# Altium PCB PCB1.PcbDoc (part 2 of 2)
Units mm, origin at the board's own origin, x right, y up, seen from the top; angles counter-clockwise.
Board outline 100.25 x 87.25 mm, 2 copper layers (Top Layer, Bottom Layer); 105 components, 70 nets, 373 pads, 474 vias.
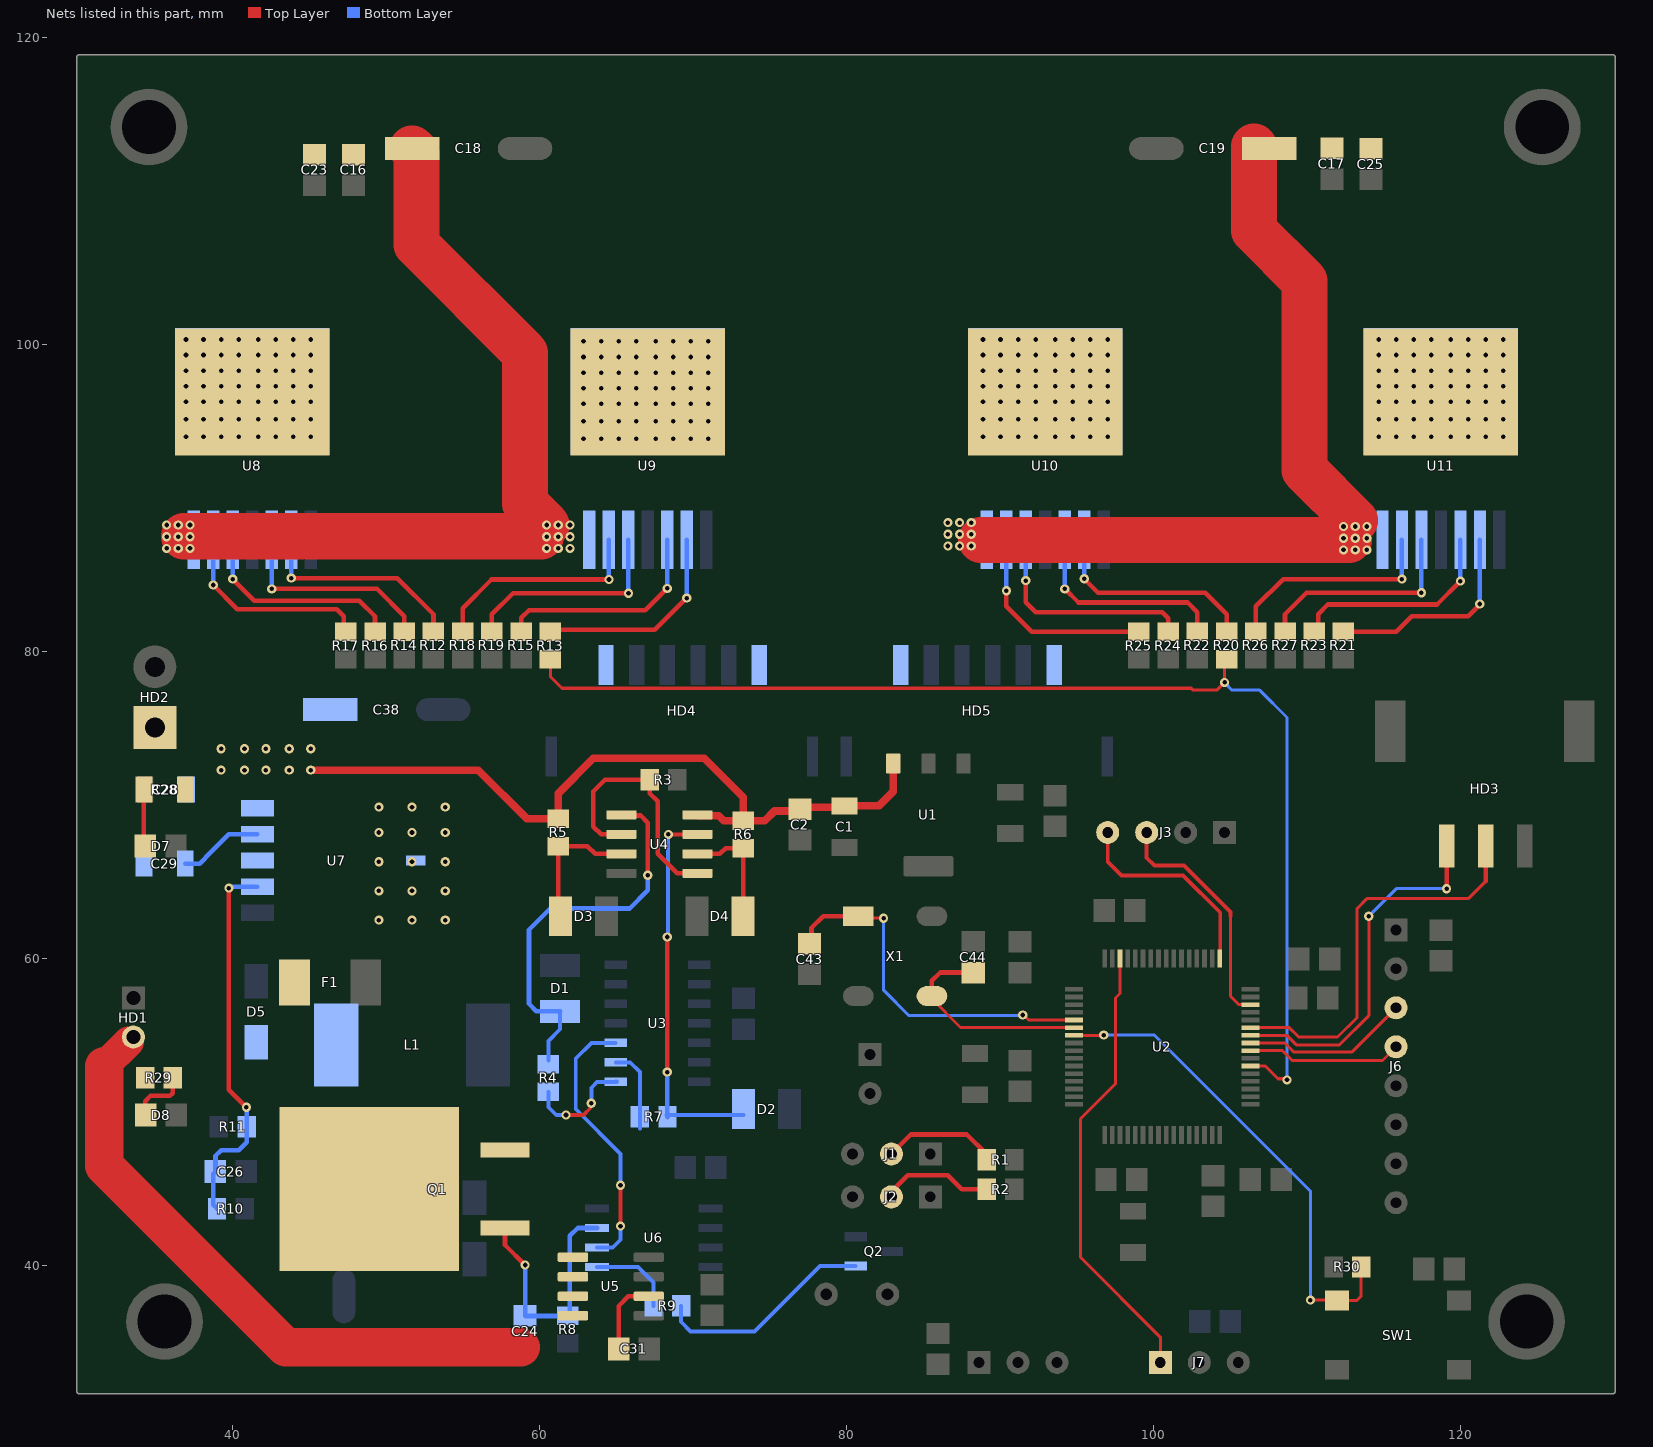
[diagram p2: the nets of this part, all layers, seen from the top]

## Via types
v1: diameter 0.6, hole 0.3, Top Layer to Bottom Layer, 474 vias

## Nets (pads, with @x,y where several pads share a name; then routed paths per layer and width w, separated by ;. In a path a pad name is that pad's centre, name@x,y a point inside that pad or via, vN(x,y) a via of type N, cw(c..) or ccw(c..) an arc to the next point about the centre after c; other vN are vias at no path point) (continued)
NetC26_1: C26.1 R10.2 R11.1 U7.2 | length 24.9
  Top Layer w0.3: v1@39.751,64.516 39.751,51.435 v1(40.894,50.292)
  Bottom Layer w0.3: R10.2@38.978,43.688 38.735,43.931 38.735,45.958 C26.1@38.878,46.101 38.878,47.133 39.243,47.498 40.386,47.498 40.905,48.017 R11.1@40.905,49.022 40.905,50.281 v1(40.894,50.292) ; v1(39.751,64.57) 39.851,64.67 U7.2@41.608,64.67
NetC29_1: C29.1 U7.4 | length 5.5
  Bottom Layer w0.3: C29.1@36.91,66.167 37.846,66.167 38.608,66.929 39.749,68.07 U7.4@41.608,68.07
NetC31_1: C31.1 U5.6 | length 5.1
  Top Layer w0.3: C31.1@65.151,34.544 65.151,37.338 65.786,37.973 U5.6@67.118,37.973 U5.6@67.183,37.973
NetD3_2: D3.2 R5.1 U4.3 | length 9.1
  Top Layer w0.3: D3.2@61.365,62.738 61.214,62.889 R5.1@61.214,67.299 61.33,67.183 61.457,67.31 63.119,67.31 63.627,66.802 U4.3@65.343,66.802
NetD4_2: D4.2 R6.1 U4.6 | length 7.5
  Top Layer w0.3: U4.6@70.293,66.802 71.755,66.802 72.125,67.172 R6.1@73.279,67.172 73.279,65.924 73.268,65.913 D4.2@73.268,62.818
NetD5_1: D5.1 L1.1 U7.3 U7.3.1
  other v1: 49.53,62.484 51.689,62.484 53.848,62.484 49.53,64.389 51.689,64.389 53.848,64.389 49.53,66.294 51.689,66.294 53.848,66.294 49.53,68.199 51.689,68.199 53.848,68.199 49.53,69.85 51.689,69.85 53.848,69.85
NetD7_1: D7.1 R28.1 | length 3.7
  Top Layer w0.3: R28.1@34.21,70.993 34.21,67.406 D7.1@34.306,67.31
NetD8_1: D8.1 R29.1 | length 3.9
  Top Layer w0.3: D8.1@34.322,49.784 34.29,49.816 34.29,50.673 34.644,51.027 35.914,51.027 36.09,51.203 R29.1@36.09,52.197
NetF1_2: F1.2 Q1.2
NetHD4_1: HD4.1 pad.2@41.275,96.901 U8.8
  other v1: 36.957,93.98 38.1,93.98 39.243,93.98 40.386,93.98 41.656,93.98 42.799,93.98 43.942,93.98 45.085,93.98 36.957,95.123 38.1,95.123 39.243,95.123 40.386,95.123 41.656,95.123 42.799,95.123 43.942,95.123 45.085,95.123 36.957,96.266 38.1,96.266 39.243,96.266 40.386,96.266 41.656,96.266 42.799,96.266 43.942,96.266 45.085,96.266 36.957,97.282 38.1,97.282 39.243,97.282 40.386,97.282 41.656,97.282 42.799,97.282 43.942,97.282 45.085,97.282 36.957,98.298 38.1,98.298 39.243,98.298 40.386,98.298 41.656,98.298 42.799,98.298 43.942,98.298 45.085,98.298 36.957,99.314 38.1,99.314 39.243,99.314 40.386,99.314 41.656,99.314 42.799,99.314 43.942,99.314 45.085,99.314 36.957,100.33 38.1,100.33 39.243,100.33 40.386,100.33 41.656,100.33 42.799,100.33 43.942,100.33 45.085,100.33
NetHD4_6: HD4.6 pad.2@67.056,96.901 U9.8
  other v1: 62.865,93.853 64.008,93.853 65.151,93.853 66.294,93.853 67.564,93.853 68.707,93.853 69.85,93.853 70.993,93.853 62.865,94.996 64.008,94.996 65.151,94.996 66.294,94.996 67.564,94.996 68.707,94.996 69.85,94.996 70.993,94.996 62.865,96.139 64.008,96.139 65.151,96.139 66.294,96.139 67.564,96.139 68.707,96.139 69.85,96.139 70.993,96.139 62.865,97.155 64.008,97.155 65.151,97.155 66.294,97.155 67.564,97.155 68.707,97.155 69.85,97.155 70.993,97.155 62.865,98.171 64.008,98.171 65.151,98.171 66.294,98.171 67.564,98.171 68.707,98.171 69.85,98.171 70.993,98.171 62.865,99.187 64.008,99.187 65.151,99.187 66.294,99.187 67.564,99.187 68.707,99.187 69.85,99.187 70.993,99.187 62.865,100.203 64.008,100.203 65.151,100.203 66.294,100.203 67.564,100.203 68.707,100.203 69.85,100.203 70.993,100.203
NetHD5_1: HD5.1 pad.2@92.964,96.901 U10.8
  other v1: 88.9,93.98 90.043,93.98 91.186,93.98 92.329,93.98 93.599,93.98 94.742,93.98 95.885,93.98 97.028,93.98 88.9,95.123 90.043,95.123 91.186,95.123 92.329,95.123 93.599,95.123 94.742,95.123 95.885,95.123 97.028,95.123 88.9,96.266 90.043,96.266 91.186,96.266 92.329,96.266 93.599,96.266 94.742,96.266 95.885,96.266 97.028,96.266 88.9,97.282 90.043,97.282 91.186,97.282 92.329,97.282 93.599,97.282 94.742,97.282 95.885,97.282 97.028,97.282 88.9,98.298 90.043,98.298 91.186,98.298 92.329,98.298 93.599,98.298 94.742,98.298 95.885,98.298 97.028,98.298 88.9,99.314 90.043,99.314 91.186,99.314 92.329,99.314 93.599,99.314 94.742,99.314 95.885,99.314 97.028,99.314 88.9,100.33 90.043,100.33 91.186,100.33 92.329,100.33 93.599,100.33 94.742,100.33 95.885,100.33 97.028,100.33
NetHD5_6: HD5.6 pad.2@118.745,96.901 U11.8
  other v1: 114.681,93.98 115.824,93.98 116.967,93.98 118.11,93.98 119.38,93.98 120.523,93.98 121.666,93.98 122.809,93.98 114.681,95.123 115.824,95.123 116.967,95.123 118.11,95.123 119.38,95.123 120.523,95.123 121.666,95.123 122.809,95.123 114.681,96.266 115.824,96.266 116.967,96.266 118.11,96.266 119.38,96.266 120.523,96.266 121.666,96.266 122.809,96.266 114.681,97.282 115.824,97.282 116.967,97.282 118.11,97.282 119.38,97.282 120.523,97.282 121.666,97.282 122.809,97.282 114.681,98.298 115.824,98.298 116.967,98.298 118.11,98.298 119.38,98.298 120.523,98.298 121.666,98.298 122.809,98.298 114.681,99.314 115.824,99.314 116.967,99.314 118.11,99.314 119.38,99.314 120.523,99.314 121.666,99.314 122.809,99.314 114.681,100.33 115.824,100.33 116.967,100.33 118.11,100.33 119.38,100.33 120.523,100.33 121.666,100.33 122.809,100.33
NetJ1_2: J1.2 R1.1 | length 7.4
  Top Layer w0.3: J1.2@82.931,47.244 84.201,48.514 87.846,48.514 89.143,47.217 R1.1@89.143,47.117
NetJ2_2: J2.2 R2.1 | length 7.3
  Top Layer w0.3: J2.2@82.931,44.45 82.931,44.775 84.003,45.847 86.614,45.847 87.503,44.958 R2.1@89.143,44.958
NetQ1_3: Q1.3 U5.1 U5.2
NetQ2_3: Q2.3 R9.1 | length 14.4
  Bottom Layer w0.254: R9.1@69.226,37.338 69.226,36.311 69.85,35.687 74.012,35.687 78.269,39.944 Q2.3@80.584,39.944
NetR4_1: R4.1 U3.1 | length 7.2
  Top Layer w0.254: v1(61.722,49.784) 62.865,49.784 63.307,50.226 63.307,50.48 v1(63.373,50.546)
  Bottom Layer w0.254: R4.1@60.579,51.297 60.579,50.292 61.087,49.784 v1(61.722,49.784) ; v1(63.373,50.546) 63.373,51.562 63.754,51.943 U3.1@64.897,51.943
  Bottom Layer w0.3: U3.1@64.967,51.943 U3.1@65.024,51.943
NetR7_1: R7.1 U3.2 | length 5.5
  Bottom Layer w0.254: U3.2@64.967,53.213 65.913,53.213 66.537,52.589 66.537,48.895
NetR9_2: R9.2 U6.5 | length 5.6
  Bottom Layer w0.254: U6.5@63.741,39.878 66.421,39.878 67.437,38.862 R9.2@67.437,37.338
NetR12_2: R12.2 U8.2 | length 13.9
  Top Layer w0.3: v1(43.815,84.778) 50.731,84.778 53.086,82.423 R12.2@53.086,81.291
  Bottom Layer w0.3: v1(43.815,84.778) U8.2@43.815,87.268
NetR13_1: R13.1 U9.2 | length 13.6
  Top Layer w0.3: R13.1@60.706,81.28 60.833,81.407 67.495,81.407 69.559,83.471 v1(69.587,83.471)
  Bottom Layer w0.3: v1(69.587,83.471) 69.591,83.475 69.591,87.263 U9.2@69.596,87.268
NetR14_2: R14.2 U8.3 | length 13.6
  Top Layer w0.3: v1(42.545,84.074) 49.403,84.074 51.181,82.296 R14.2@51.181,81.291
  Bottom Layer w0.3: v1(42.545,84.074) U8.3@42.545,87.268
NetR15_1: R15.1 U9.3 | length 14.4
  Top Layer w0.3: R15.1@58.801,81.291 58.817,81.307 58.817,82.185 59.309,82.677 66.888,82.677 v1(68.317,84.106)
  Bottom Layer w0.3: v1(68.317,84.106) 68.321,84.11 68.321,87.263 U9.3@68.326,87.268
NetR16_1: R16.1 U8.5 | length 13.8
  Top Layer w0.3: v1(40.005,84.709) 41.402,83.312 48.26,83.312 49.276,82.296 R16.1@49.276,81.28
  Bottom Layer w0.3: v1(40.005,84.709) U8.5@40.005,87.268
NetR17_1: R17.1 U8.6 | length 13.4
  Top Layer w0.3: v1(38.735,84.328) 40.305,82.758 46.782,82.758 47.244,82.296 47.244,81.407 R17.1@47.371,81.28
  Bottom Layer w0.3: v1(38.735,84.328) U8.6@38.735,87.268
NetR18_1: R18.1 U9.6 | length 14.4
  Top Layer w0.3: R18.1@54.991,81.291 54.991,82.804 56.869,84.682 v1(64.524,84.682)
  Bottom Layer w0.3: U9.6@64.516,87.268 64.52,87.264 64.52,84.686 v1(64.524,84.682)
NetR19_1: R19.1 U9.5 | length 14.1
  Top Layer w0.3: R19.1@56.896,81.291 56.896,82.423 58.266,83.793 v1(65.794,83.793)
  Bottom Layer w0.3: U9.5@65.786,87.268 65.79,87.264 65.79,83.797 v1(65.794,83.793)
NetR20_2: R20.2 U10.2 | length 13.9
  Top Layer w0.3: v1(95.495,84.741) 95.495,84.718 96.393,83.82 103.378,83.82 104.775,82.423 R20.2@104.775,81.291
  Bottom Layer w0.3: v1(95.495,84.741) 95.499,84.745 95.499,87.263 U10.2@95.504,87.268
NetR21_1: R21.1 U11.2 | length 13.8
  Top Layer w0.3: R21.1@112.395,81.291 115.835,81.291 116.84,82.296 120.523,82.296 121.276,83.049 v1(121.276,83.09)
  Bottom Layer w0.3: v1(121.276,83.09) 121.28,83.094 121.28,87.263 U11.2@121.285,87.268
NetR22_2: R22.2 U10.3 | length 13.7
  Top Layer w0.3: v1(94.234,84.074) 95.123,83.185 102.235,83.185 102.87,82.55 R22.2@102.87,81.291
  Bottom Layer w0.3: v1(94.234,84.074) U10.3@94.234,87.268
NetR23_1: R23.1 U11.3 | length 14.1
  Top Layer w0.3: R23.1@110.49,81.291 110.74,81.541 110.74,82.419 111.379,83.058 118.491,83.058 v1(120.015,84.582)
  Bottom Layer w0.3: v1(120.015,84.582) U11.3@120.015,87.268
NetR24_1: R24.1 U10.5 | length 14.7
  Top Layer w0.3: v1(91.685,84.614) 91.685,83.194 92.329,82.55 100.584,82.55 100.965,82.169 R24.1@100.965,81.28
  Bottom Layer w0.3: v1(91.685,84.614) 91.689,84.618 91.689,87.263 U10.5@91.694,87.268
NetR25_1: R25.1 U10.6 | length 13.7
  Top Layer w0.3: v1(90.424,83.947) 90.424,82.931 92.075,81.28 R25.1@99.06,81.28
  Bottom Layer w0.3: v1(90.424,83.947) U10.6@90.424,87.268
NetR26_1: R26.1 U11.6 | length 14.5
  Top Layer w0.3: R26.1@106.68,81.291 106.68,82.931 108.458,84.709 v1(116.205,84.709)
  Bottom Layer w0.3: v1(116.205,84.709) U11.6@116.205,87.268
NetR27_1: R27.1 U11.5 | length 14
  Top Layer w0.3: R27.1@108.585,81.291 108.585,82.423 109.982,83.82 v1(117.475,83.82)
  Bottom Layer w0.3: v1(117.475,83.82) U11.5@117.475,87.268
OSC_IN: C43.2 U2.5 X1.1 | length 23.1
  Top Layer w0.2: X1.1@80.772,62.738 80.899,62.611 v1(82.423,62.611) ; v1(91.486,56.303) 91.552,56.303 91.876,55.979 U2.5@94.834,55.979
  Top Layer w0.3: C43.2@77.597,60.944 77.724,61.071 77.724,61.976 78.486,62.738 X1.1@79.782,62.738
  Bottom Layer w0.2: v1(82.423,62.611) 82.423,57.912 84.074,56.261 91.444,56.261 v1(91.486,56.303)
OSC_OUT: C44.1 U2.6 X1.3 | length 14.1
  Top Layer w0.2: X1.3@85.572,57.538 85.572,57.352 87.439,55.485 93.839,55.485 93.846,55.479 U2.6@94.834,55.479
  Top Layer w0.3: X1.3@85.572,57.538 85.572,58.521 86.122,59.071 C44.1@88.265,59.071
REVERSE: R13.2 R20.1 U2.38 | length 78.5
  Top Layer w0.2: R13.2@60.706,79.48 60.706,78.359 61.468,77.597 102.472,77.597 102.599,77.47 104.14,77.47 104.622,77.952 104.648,77.952 104.648,79.364 R20.1@104.775,79.491 ; U2.38@106.334,52.979 107.295,52.979 108.127,52.147 108.635,52.147 v1(108.712,52.07)
  Bottom Layer w0.2: v1(104.648,77.978) 104.648,77.952 105.13,77.47 106.934,77.47 108.712,75.692 v1@108.712,52.227
RST: R30.1 SW1.3 U2.7 | length 32.1
  Top Layer w0.2: U2.7@94.834,54.979 96.762,54.979 v1(96.774,54.991) ; v1(110.236,37.719) 111.94,37.719 SW1.3@111.976,37.683 113.248,37.683 113.549,37.984 R30.1@113.549,39.878
  Bottom Layer w0.2: v1(96.774,54.991) 100.076,54.991 110.236,44.831 v1(110.236,37.719)
RX: HD3.2 U2.43 | length 26.2
  Top Layer w0.2: U2.43@106.334,55.479 108.859,55.479 109.474,54.864 112.007,54.864 113.284,56.141 113.284,63.246 113.919,63.881 120.523,63.881 121.666,65.024
  Top Layer w0.3: 121.666,65.024 HD3.2@121.666,67.31
SCL: J6.3 U2.41 | length 10.9
  Top Layer w0.2: U2.41@106.334,54.479 108.558,54.479 109.135,53.902 112.957,53.902 J6.3@115.824,56.769
SCLK: J3.4 U2.49 | length 13.6
  Top Layer w0.2: U2.49@104.334,59.979 104.334,60.446 104.364,60.476 104.364,60.78
  Top Layer w0.254: J3.4@97.028,68.199 97.028,66.294 97.917,65.405 101.928,65.405 104.364,62.969 104.364,60.78
SDA: J6.4 U2.40 | length 10.1
  Top Layer w0.2: U2.40@106.334,53.979 108.416,53.979 109.055,53.34 114.935,53.34 J6.4@115.824,54.229
SDIO: J3.3 U2.46 | length 15.6
  Top Layer w0.2: 105.029,62.738 105.029,57.531 105.581,56.979 U2.46@106.334,56.979
  Top Layer w0.254: J3.3@99.568,68.199 99.568,66.548 100.076,66.04 102.011,66.04 105.029,63.022 105.029,62.738
SIGNAL: C24.1 Q1.1 R8.2 U6.7 | length 16.4
  Top Layer w0.3: Q1.1@57.747,42.418 57.747,41.313 v1(59.055,40.005)
  Bottom Layer w0.3: C24.1@59.055,36.687 61.96,36.687 R8.2@61.976,36.703 ; C24.1@59.055,36.703 v1(59.055,40.005) ; R8.2@61.849,36.703 61.976,36.83 61.976,41.91 62.484,42.418 U6.7@63.741,42.418
Steer: J7.1 U2.62 | length 29.6
  Top Layer w0.2: U2.62@97.834,59.979 97.834,57.702 97.536,57.404 97.536,51.816 95.25,49.53 95.25,40.513 100.457,35.306 J7.1@100.457,33.655
ToVcc_NANO: HD1.2 R29.2 U5.3 U5.4 | length 40.8
  Top Layer w2: 31.623,52.959 HD1.2@33.21,54.546
  Top Layer w2.5: 31.623,52.959 31.623,46.482 43.456,34.649 58.779,34.649
TX: HD3.1 U2.42 | length 23.8
  Top Layer w0.2: U2.42@106.334,54.979 108.7,54.979 109.323,54.356 112.141,54.356 114.046,56.261 v1(114.046,62.738)
  Top Layer w0.3: v1(119.113,64.535) 119.113,67.297 HD3.1@119.126,67.31
  Bottom Layer w0.2: v1(114.046,62.738) 115.843,64.535 v1(119.113,64.535)
V_CELL: C1.1 C2.1 C16.1 C17.1 C18.1 C19.1 C23.1 C25.1 C28.2 C29.2 C38.1 HD2.1 R5.2 R6.2 R28.2 U1.3 U4.8 U7.5 U8.7 U9.7 U10.7 U11.7 | length 152
  Top Layer w0.5: HD2.1@34.925,74.549 HD2.1@35.052,74.676 ; v1(45.085,72.263) 56.007,72.263 59.182,69.088 R5.2@61.214,69.088 ; R5.2@61.214,69.099 61.214,70.739 63.5,73.025 70.739,73.025 73.279,70.485 R6.2@73.279,69.188 ; U4.8@70.293,69.342 70.343,69.292 71.678,69.292 71.998,68.972 R6.2@73.279,68.972 74.687,68.972 75.311,69.596 C2.1@77.089,69.596 ; C2.1@76.962,69.707 77.105,69.85 79.803,69.85 C1.1@79.883,69.93 82.122,69.93 83.058,70.866 U1.3@83.058,72.644
  Top Layer w3: 36.83,87.503 49.93,87.503 ; 50.292,87.503 60.09,87.503 ; C18.1@51.689,112.776 51.967,112.498 51.967,106.529 59.055,99.441 59.055,89.643 v1(60.46,88.238) ; 88.773,87.249 112.764,87.249 ; C19.1@106.553,112.903 106.553,107.442 109.855,104.14 109.855,92.214 ; 109.855,91.821 113.157,88.519
  other v1: 39.243,72.263 40.767,72.263 42.164,72.263 43.688,72.263 39.243,73.66 40.767,73.66 42.164,73.66 43.688,73.66 45.085,73.66 112.395,86.614 113.157,86.614 113.919,86.614 35.695,86.714 36.457,86.714 37.219,86.714 60.46,86.714 61.222,86.714 61.984,86.714 86.614,86.868 87.376,86.868 88.138,86.868 112.395,87.376 113.157,87.376 113.919,87.376 35.695,87.476 36.457,87.476 37.219,87.476 60.46,87.476 61.222,87.476 61.984,87.476 86.614,87.63 87.376,87.63 88.138,87.63 112.395,88.138 113.157,88.138 113.919,88.138 35.695,88.238 36.457,88.238 37.219,88.238 61.222,88.238 61.984,88.238 86.614,88.392 87.376,88.392 88.138,88.392
Volt_SIG: U3.3 U6.6 | length 17.8
  Top Layer w0.254: v1(65.278,42.545) v1(65.278,45.212)
  Bottom Layer w0.254: U6.6@63.741,41.148 64.77,41.148 65.278,41.656 v1(65.278,42.545) ; U3.3@64.967,54.483 63.373,54.483 62.357,53.467 62.357,50.165 65.278,47.244 v1(65.278,45.212)
Vout_1: D1.2 R4.2 U4.1 | length 25.7
  Top Layer w0.3: U4.1@65.343,69.342 65.379,69.306 66.584,69.306 67.056,68.834 v1(67.056,65.405)
  Bottom Layer w0.254: R4.2@60.579,53.34 60.579,54.61 61.341,55.372 D1.2@61.341,56.539
  Bottom Layer w0.3: D1.2@61.341,56.539 59.793,56.539 59.309,57.023 59.309,61.849 60.706,63.246 65.873,63.246 67.056,64.429 v1(67.056,65.405)
Vout_2: D2.2 R7.2 U4.7 | length 25.4
  Top Layer w0.254: v1(68.395,68.072) U4.7@70.293,68.072
  Top Layer w0.3: v1(68.326,52.578) v1(68.326,61.383)
  Bottom Layer w0.254: R7.2@68.262,49.784 68.326,49.784 D2.2@73.303,49.784 ; v1(68.326,61.383) 68.361,61.417 68.361,68.038 v1(68.395,68.072)
  Bottom Layer w0.3: v1(68.326,52.578) 68.326,49.784 68.326,49.668 R7.2@68.337,49.657
Vref: R3.1 U4.2 U4.5 | length 16.5
  Top Layer w0.3: U4.2@65.343,68.072 64.008,68.072 63.5,68.58 63.5,70.866 64.262,71.628 R3.1@67.172,71.628 67.183,71.617 67.183,70.739 67.691,70.231 67.691,66.802 68.961,65.532 U4.5@70.293,65.532
pads on no net: HD3. HD4. HD4.2 HD4.3 HD4.4 HD4.5 HD5. J6.5 J6.6 J6.7 J6.8 U1.2 U2.2 U2.3 U2.4 U2.8 U2.9 U2.10 U2.11 U2.14 U2.15 U2.16 U2.17 U2.20 U2.21 U2.22 U2.23 U2.24 U2.25 U2.26 U2.27 U2.29 U2.30 U2.33 U2.34 U2.35 U2.36 U2.44 U2.45 U2.50 U2.51 U2.52 U2.53 U2.54 U2.55 U2.56 U2.59 U3.4 U3.5 U3.6 U3.8 U3.9 U3.10 U3.11 U3.12 U3.13 U6.2 U6.3 U8.4 U9.4 U10.4 U11.4

## Polygon pours and split planes (outlines as drawn)
GND on Top Layer "GND_L01_P089" (solid, pour order 89): 30.353,80.01 30.353,56.515 38.354,56.515 38.354,65.405 33.02,65.405 33.02,77.597 34.925,77.597 34.925,80.01
GND on Top Layer "GND_L01_P104" (solid, pour order 104): 92.329,37.338 94.742,37.338 94.742,40.894 92.329,40.894
V_CELL on Top Layer "NONET_L02_P-001" (solid, pour order 108): 35.56,76.454 35.56,69.469 46.609,69.469 46.609,76.454
GND on Top Layer "NONET_L02_P-001" (solid, pour order 107): 36.83,68.072 36.83,65.278 38.354,65.278 38.354,68.072
+5 on Top Layer "+5_L01_P105" (solid, pour order 105): 89.916,34.861 83.312,34.862 83.312,36.767 89.916,36.766
GND on Top Layer "GND_L01_P074" (solid, pour order 74): 57.023,113.538 101.981,113.538 101.981,108.204 57.023,108.204
GND on Top Layer "GND_L01_P101" (solid, pour order 101): 75.184,85.471 76.805,87.122 76.805,88.773 74.676,88.773 74.549,88.646 74.549,85.471
GND on Top Layer "GND_L01_P100" (solid, pour order 100): 71.12,89.535 75.184,89.535 75.184,85.471 71.12,85.471
GND on Top Layer "GND_L01_P099" (solid, pour order 99): 44.577,108.204 46.99,105.791 46.99,89.662 49.53,89.662 49.53,107.315 48.641,108.204
ToVcc_NANO on Top Layer "TOVCC_NANO_L01_P024" (solid, pour order 24): 60.579,38.354 63.246,38.354 63.246,33.401 57.023,33.401 57.023,35.746 58.674,36.957
GND on Top Layer "GND_L01_P078" (solid, pour order 78): 44.577,110.744 48.641,110.744 48.641,107.95 44.577,107.95
GND on Top Layer "GND_L01_P075" (solid, pour order 75): 110.871,111.125 114.935,111.125 114.935,108.331 110.871,108.331
V_CELL on Top Layer "V_CELL_L01_P061" (solid, pour order 61): 53.086,118.364 116.078,118.364 116.078,114.554 53.213,114.554 53.086,114.681
GND on Top Layer "GND_L01_P073" (solid, pour order 73): 100.584,95.631 100.584,91.44 103.505,91.44 103.505,95.631
V_CELL on Top Layer "V_CELL_L01_P068" (solid, pour order 68): 89.154,89.154 86.106,89.154 86.106,85.344 89.154,85.344
V_CELL on Top Layer "V_CELL_L01_P067" (solid, pour order 67): 104.648,114.935 104.648,111.887 114.935,111.887 116.078,113.03 116.078,115.189
V_CELL on Top Layer "V_CELL_L01_P066" (solid, pour order 66): 114.808,89.09 111.76,89.09 111.76,85.407 114.808,85.407
V_CELL on Top Layer "V_CELL_L01_P064" (solid, pour order 64): 37.719,89.154 35.306,89.154 35.306,85.471 37.719,85.471
V_CELL on Top Layer "V_CELL_L01_P063" (solid, pour order 63): 62.865,89.154 59.817,89.154 59.817,85.344 62.865,85.344
V_CELL on Top Layer "V_CELL_L01_P060" (solid, pour order 60): 30.226,104.521 30.226,110.744 42.164,110.744 35.941,104.521
V_CELL on Top Layer "V_CELL_L01_P059" (solid, pour order 59): 30.226,104.902 30.226,83.312 34.798,83.312 34.798,105.006
V_CELL on Top Layer "V_CELL_L01_P058" (solid, pour order 58): 44.958,111.887 53.467,111.887 53.467,118.364 38.481,118.364 38.481,112.903 33.655,108.077 34.544,101.727
V_CELL on Top Layer "V_CELL_L01_P057" (solid, pour order 57): 35.56,81.407 38.862,78.105 41.529,78.105 41.529,81.407 41.402,81.534
V_CELL on Top Layer "V_CELL_L01_P056" (solid, pour order 56): 30.226,84.709 37.338,84.709 40.64,81.407 40.64,81.026 30.226,81.026
V_CELL on Top Layer "V_CELL_L01_P055" (solid, pour order 55): 38.227,76.2 46.609,76.2 46.609,76.708 41.275,82.042 38.227,82.042
NetQ1_3 on Top Layer "NETQ1_3_L01_P023" (solid, pour order 23): 59.055,48.006 59.563,48.006 63.246,48.006 63.246,38.862 60.579,38.862 60.579,43.434 60.389,43.878 58.61,45.402 56.261,45.402 56.261,47.003 56.261,48.006
+5 on Top Layer "+5_L01_P050" (solid, pour order 50): 57.785,57.023 58.166,57.023 61.341,53.848 57.023,53.848
+5 on Top Layer "+5_L01_P000" (solid, pour order 0): 55.118,57.023 58.166,57.023 58.166,51.562 55.118,51.562
NetF1_2 on Top Layer "NETF1_2_L01_P032" (solid, pour order 32): 45.085,56.388 53.467,49.784 45.72,49.784 45.085,49.784
ToVcc_NANO on Top Layer "TOVCC_NANO_L01_P026" (solid, pour order 26): 30.353,51.435 30.353,55.753 34.925,55.753 34.925,51.435
+5 on Top Layer "+5_L01_P015" (solid, pour order 15): 49.276,59.864 51.181,58.928 55.118,56.261 58.166,56.388 57.277,59.864 50.024,59.864
NetF1_2 on Top Layer "NETF1_2_L01_P018" (solid, pour order 18): 42.989,57.023 42.989,50.165 45.529,50.292 45.529,59.944 42.989,59.944
+5 on Top Layer "+5_L01_P016" (solid, pour order 16): 49.276,59.864 49.276,57.023 51.562,57.023 51.562,59.69 51.388,59.864
+5 on Top Layer "+5_L01_P014" (solid, pour order 14): 49.911,59.944 55.118,56.261 55.753,52.578 51.562,56.769
GND on Bottom Layer "GND_L02_P086" (solid, pour order 86): 30.353,78.486 30.353,56.515 38.735,56.515 38.735,64.262 33.02,64.262 33.02,78.486
GND on Bottom Layer "NONET_L02_P-001" (solid, pour order 123): 71.882,39.624 74.676,39.624 74.676,40.64 71.882,40.64
GND on Bottom Layer "NONET_L02_P-001" (solid, pour order 112): 37.211,81.28 54.61,81.28 54.61,77.597 37.211,77.597
NetHD5_1 on Bottom Layer "NETHD5_1_L02_P053" (solid, pour order 53): 88.519,101.092 80.137,95.6 80.137,81.581 84.074,77.752 84.074,92.964 89.281,92.964
NetHD4_1 on Bottom Layer "NONET_L02_P-001" (solid, pour order 122): 64.77,80.391 62.992,82.169 58.547,82.169
NetHD4_1 on Bottom Layer "NONET_L02_P-001" (solid, pour order 121): 56.261,85.471 60.325,81.407 56.261,81.407
NetHD5_6 on Bottom Layer "NONET_L02_P-001" (solid, pour order 120): 105.664,97.155 109.601,101.092 114.427,101.092 105.664,92.329
NetHD5_6 on Bottom Layer "NONET_L02_P-001" (solid, pour order 119): 113.792,101.092 105.664,92.964 105.664,83.439 95.885,83.439 92.964,80.518 92.964,77.724 95.631,77.724 98.044,80.137 110.49,80.137 110.49,92.837 113.665,92.837 113.792,92.964
NetHD5_1 on Bottom Layer "NONET_L02_P-001" (solid, pour order 116): 88.011,101.092 84.455,101.092 80.137,96.774 80.137,95.377 84.836,95.377 88.011,98.552
NetHD4_6 on Bottom Layer "NETHD4_6_L02_P115" (solid, pour order 115): 71.501,101.092 74.422,101.092 78.486,97.028 78.486,93.975
NetHD4_6 on Bottom Layer "NETHD4_6_L02_P042" (solid, pour order 42): 71.633,101.107 78.486,95.309 78.486,81.636 74.168,78.181 74.168,92.837 69.034,92.837
NetHD4_1 on Bottom Layer "NONET_L02_P-001" (solid, pour order 114): 59.69,78.486 60.452,77.724 64.77,77.724 64.77,78.486
GND on Bottom Layer "NONET_L02_P-001" (solid, pour order 113): 49.276,77.597 49.276,73.406 54.61,73.406 54.61,78.247
V_CELL on Bottom Layer "V_CELL_L02_P033" (solid, pour order 33): 35.56,76.454 39.497,76.454 47.879,76.454 47.879,72.978 44.704,70.806 44.704,69.215 38.776,69.215 35.651,69.215 35.645,69.681
NetHD5_1 on Bottom Layer "NONET_L02_P-001" (solid, pour order 111): 80.137,82.042 80.137,80.391 82.677,77.851 83.312,77.851 83.312,78.867
NetHD4_1 on Bottom Layer "NETHD4_1_L02_P048" (solid, pour order 48): 46.101,101.092 53.975,101.092 56.642,98.425 56.642,83.312 51.562,83.312 51.562,92.837 46.101,92.837
V_CELL on Bottom Layer "NONET_L02_P-001" (solid, pour order 110): 38.227,76.454 38.227,76.962 46.355,76.962 46.863,76.454
V_CELL on Bottom Layer "NONET_L02_P-001" (solid, pour order 109): 33.655,65.913 33.655,69.342 39.37,69.342 37.592,67.564 34.798,67.564 34.798,65.913
+5 on Bottom Layer "+5_L02_P037" (solid, pour order 37): 40.576,42.926 40.576,46.889 44.386,48.006 58.229,48.006 58.229,42.926
GND on Bottom Layer "GND_L02_P093" (solid, pour order 93): 62.611,35.433 56.007,35.433 56.007,32.258 62.611,32.258
+5 on Bottom Layer "+5_L02_P049" (solid, pour order 49): 55.118,57.277 58.293,57.277 58.293,47.625 55.118,47.625
+5 on Bottom Layer "+5_L02_P036" (solid, pour order 36): 54.356,47.117 58.293,47.117 58.293,57.785 54.356,57.785
GND on Bottom Layer "GND_L02_P092" (solid, pour order 92): 30.353,56.896 30.353,32.258 56.769,32.258 56.769,41.529 37.338,41.529 37.338,56.896
GND on Bottom Layer "GND_L02_P102" (solid, pour order 102): 92.202,38.481 94.488,38.481 94.488,40.894 92.202,40.894
GND on Bottom Layer "GND_L02_P097" (solid, pour order 97): 39.624,57.15 39.624,48.387 37.211,48.387 37.211,57.15
GND on Bottom Layer "GND_L02_P091" (solid, pour order 91): 37.211,81.28 37.211,77.597 32.893,77.597 32.893,81.153 34.163,84.582
GND on Bottom Layer "GND_L02_P088" (solid, pour order 88): 32.893,72.263 34.925,72.263 34.925,69.977 32.893,69.977
GND on Bottom Layer "GND_L02_P087" (solid, pour order 87): 38.608,63.5 42.672,63.5 42.672,57.15 38.608,57.15
GND on Bottom Layer "GND_L02_P085" (solid, pour order 85): 30.226,103.378 30.226,78.105 34.798,78.105 34.798,103.378
GND on Bottom Layer "GND_L02_P084" (solid, pour order 84): 57.912,111.252 65.278,111.252 65.278,106.807 61.595,106.807 57.912,103.124
GND on Bottom Layer "GND_L02_P083" (solid, pour order 83): 100.076,111.125 95.631,111.125 95.631,108.966 98.806,105.791 100.076,105.791
GND on Bottom Layer "GND_L02_P080" (solid, pour order 80): 125.289,109.601 129.734,109.601 129.734,85.598 122.495,85.598 122.495,90.297 125.289,90.297
GND on Bottom Layer "GND_L02_P077" (solid, pour order 77): 57.975,111.252 37.719,111.252 36.449,109.982 30.162,109.982 30.162,103.251 57.975,103.251
GND on Bottom Layer "GND_L02_P076" (solid, pour order 76): 100.076,111.125 129.667,111.125 129.667,105.791 100.076,105.791
GND on Bottom Layer "GND_L02_P072" (solid, pour order 72): 100.584,94.17 103.505,94.17 103.505,85.661 96.774,85.661 96.774,89.09 100.584,89.09
GND on Bottom Layer "GND_L02_P071" (solid, pour order 71): 46.863,92.075 49.657,92.075 49.657,85.408 45.085,85.408 45.085,89.091 46.863,89.09
GND on Bottom Layer "GND_L02_P069" (solid, pour order 69): 70.929,89.535 73.343,89.535 73.342,85.09 70.929,85.09
V_CELL on Bottom Layer "V_CELL_L02_P065" (solid, pour order 65): 114.681,89.154 111.633,89.154 111.633,85.471 114.681,85.471
V_CELL on Bottom Layer "V_CELL_L02_P062" (solid, pour order 62): 35.306,89.154 35.306,85.471 37.592,85.471 37.592,89.154
V_CELL on Bottom Layer "V_CELL_L02_P051" (solid, pour order 51): 89.027,89.154 85.979,89.154 85.979,85.344 89.027,85.344
NetHD4_1 on Bottom Layer "NETHD4_1_L02_P046" (solid, pour order 46): 64.77,80.518 56.642,82.847 56.642,90.037 51.541,83.291 56.524,78.309 64.77,78.309
V_CELL on Bottom Layer "V_CELL_L02_P044" (solid, pour order 44): 62.865,89.154 59.817,89.154 59.817,85.344 62.865,85.344
NetHD4_6 on Bottom Layer "NETHD4_6_L02_P042" (solid, pour order 43): 74.676,77.851 74.676,78.867 76.708,80.899 78.486,81.788 78.486,80.391 75.946,77.851
NetD5_1 on Bottom Layer "NETD5_1_L02_P031" (solid, pour order 31): 50.038,56.261 50.038,50.546 43.254,50.546 40.64,52.959 40.64,53.848 40.64,56.261
NetD5_1 on Bottom Layer "NETD5_1_L02_P029" (solid, pour order 29): 44.704,63.5 44.704,57.023 51.219,57.023 54.889,60.97 54.864,60.995 54.864,63.5
NetD5_1 on Bottom Layer "NETD5_1_L02_P021" (solid, pour order 21): 45.684,66.929 49.911,70.739 49.911,56.007 43.815,56.007 43.815,65.786 41.529,65.786 41.529,66.929

## Keep-outs
Keep-Out Layer:
  lines w0.254: 29.972,31.75 29.972,118.75 130.048,118.75 130.048,31.75 29.972,31.75

## Silkscreen, mask and mechanical layers (free items; w line width, h text height)
Top Overlay:
  lines w0.254: 30.226,85.979 30.226,108.077 52.451,108.077 52.451,85.979 30.353,85.979 ; 56.134,85.979 56.134,108.077 ; 56.261,85.979 78.359,85.979 78.359,108.077 56.261,108.077 ; 82.089,85.974 82.089,108.072 ; 82.216,85.974 104.314,85.974 104.314,108.072 82.216,108.072 ; 99.06,35.052 98.933,35.052 ; 107.743,85.974 107.743,108.072 ; 107.87,85.974 129.968,85.974 129.968,108.072 107.87,108.072 ; 117.157,42.545 129.54,42.545 129.54,63.373 117.157,63.373 ; 98.933,35.052 98.933,32.385 106.934,32.385 106.934,35.052 98.933,35.052 ; 34.163,89.916 48.26,89.916 48.26,104.013 34.163,104.013 34.163,89.916 ; 60.071,89.916 74.168,89.916 74.168,104.013 60.071,104.013 60.071,89.916 ; 86.026,89.911 86.026,104.008 100.123,104.008 100.123,89.911 86.026,89.911 ; 87.122,32.385 87.122,35.052 95.123,35.052 95.123,32.385 87.122,32.385 ; 111.68,89.911 111.68,104.008 125.777,104.008 125.777,89.911 111.68,89.911
  text "22x22mm" at 37.338,105.41 h1
  text "22x22mm" at 63.458,105.41 h1
  text "22x22mm" at 89.831,105.41 h1
  text "22x22mm" at 115.189,105.41 h1
  text "14x14mm" at 37.592,102.108 h1
  text "14x14mm" at 63.881,102.108 h1
  text "14x14mm" at 89.789,102.108 h1
  text "14x14mm" at 115.316,102.108 h1
  text "Heat sink" at 63.119,91.059 h1
  text "Heat sink" at 89.027,91.059 h1
  text "Heat sink" at 115.062,91.059 h1
  text "Heat sink" at 37.211,90.932 h1
  text "GND" at 39.116,78.613 h1
  text "V_CELL" at 39.116,74.462 h1
  text "GND" at 37.084,56.896 h1
  text "V_NANO" at 37.084,54.142 h1
  text "MPU6050" at 118.364,52.578 h1.52
  text "BOOT1" at 73.914,46.812 h1
  text "BOOT0" at 73.787,44.018 h1
  text "Steer" at 100.838,35.814 h1 r90
  text "+5V" at 103.378,35.814 h1 r90
  text "GND" at 106.045,35.814 h1 r90
  text "Cam" at 89.027,35.56 h1 r90
  text "+5V" at 91.567,35.56 h1 r90
  text "GND" at 94.234,35.56 h1 r90

## Text inside footprints (layer, text, board x,y; h text height)
C18: Top Overlay "+" at 52.02,113.676 h0.89
C19: Top Overlay "+" at 107.238,111.876 h0.89 r180
C27: Bottom Overlay "+" at 46.344,45.008 h0.89 r90
C38: Bottom Overlay "+" at 46.686,75.3 h0.89 r180
Q1: Mechanical 13 "*" at 55.004,42.1 h1.27 r90
U3: Bottom Overlay "*" at 64.395,51.511 h1.27 r180; Mechanical 13 "*" at 65.761,52.73 h1.27 r180
U6: Bottom Overlay "*" at 71.704,44.094 h1.27; Mechanical 13 "*" at 70.079,43.116 h1.27